# EAGLE board Addon-LAN-WLAN-without-MAPLE_or-OneWire_or_RS485-V01-012 (EAGLE 9.3.0)
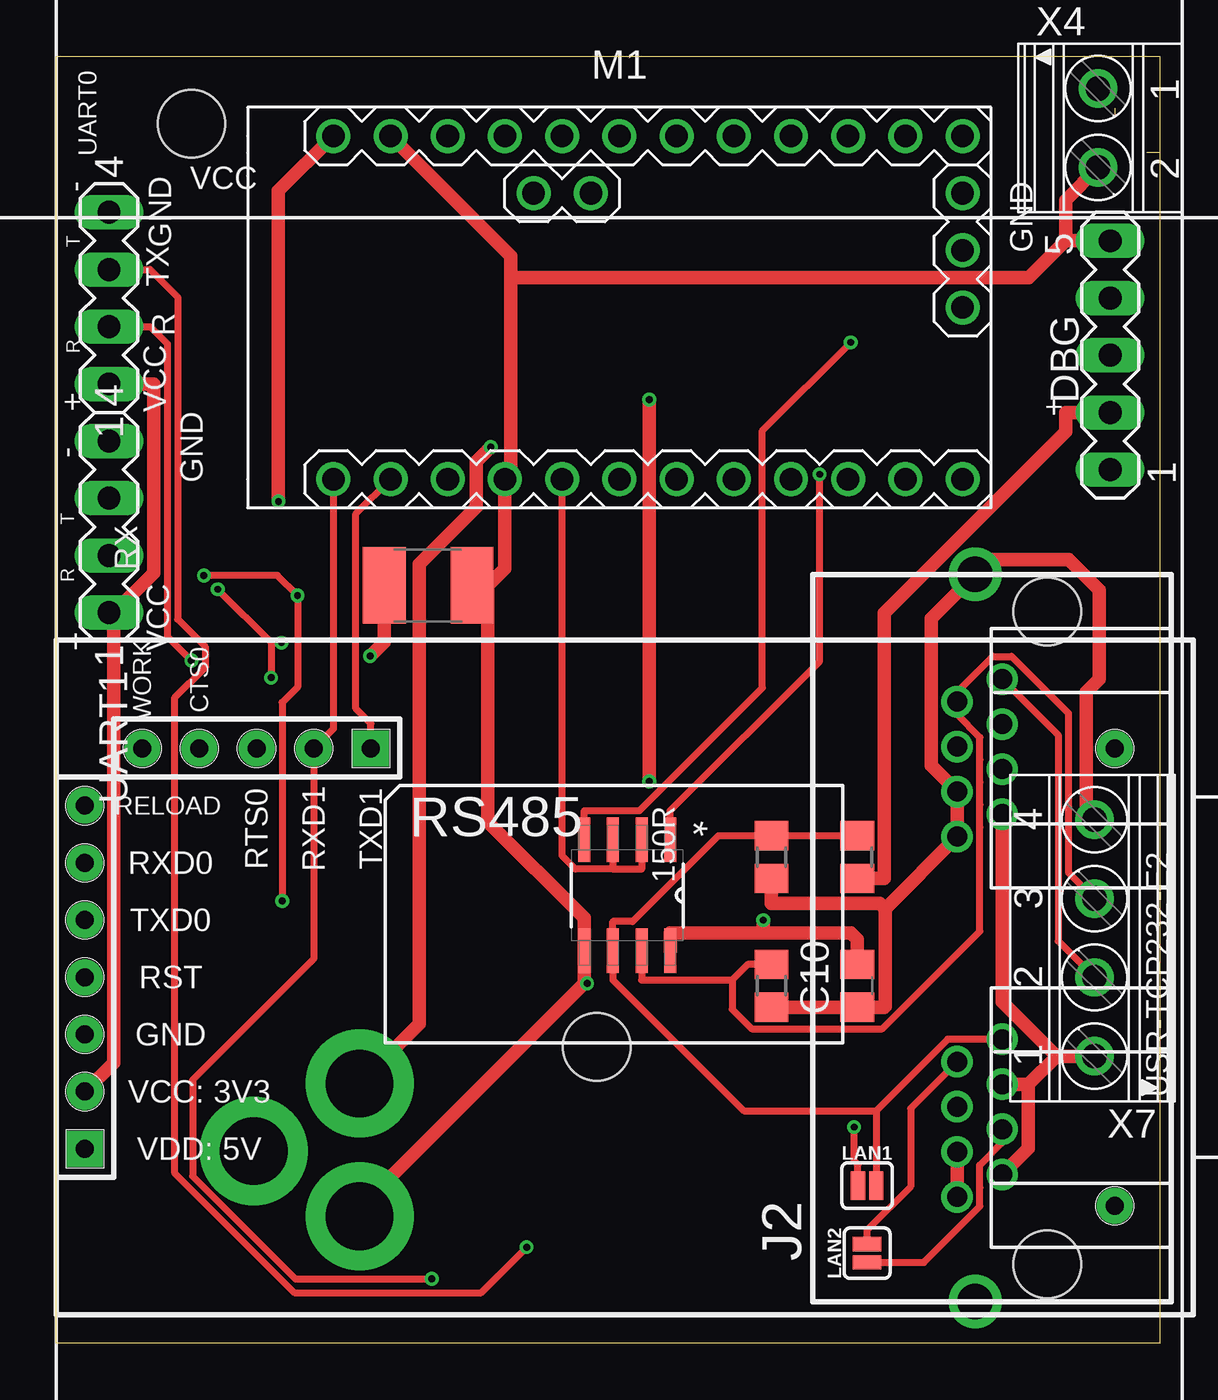
[diagram p0: board, top side]
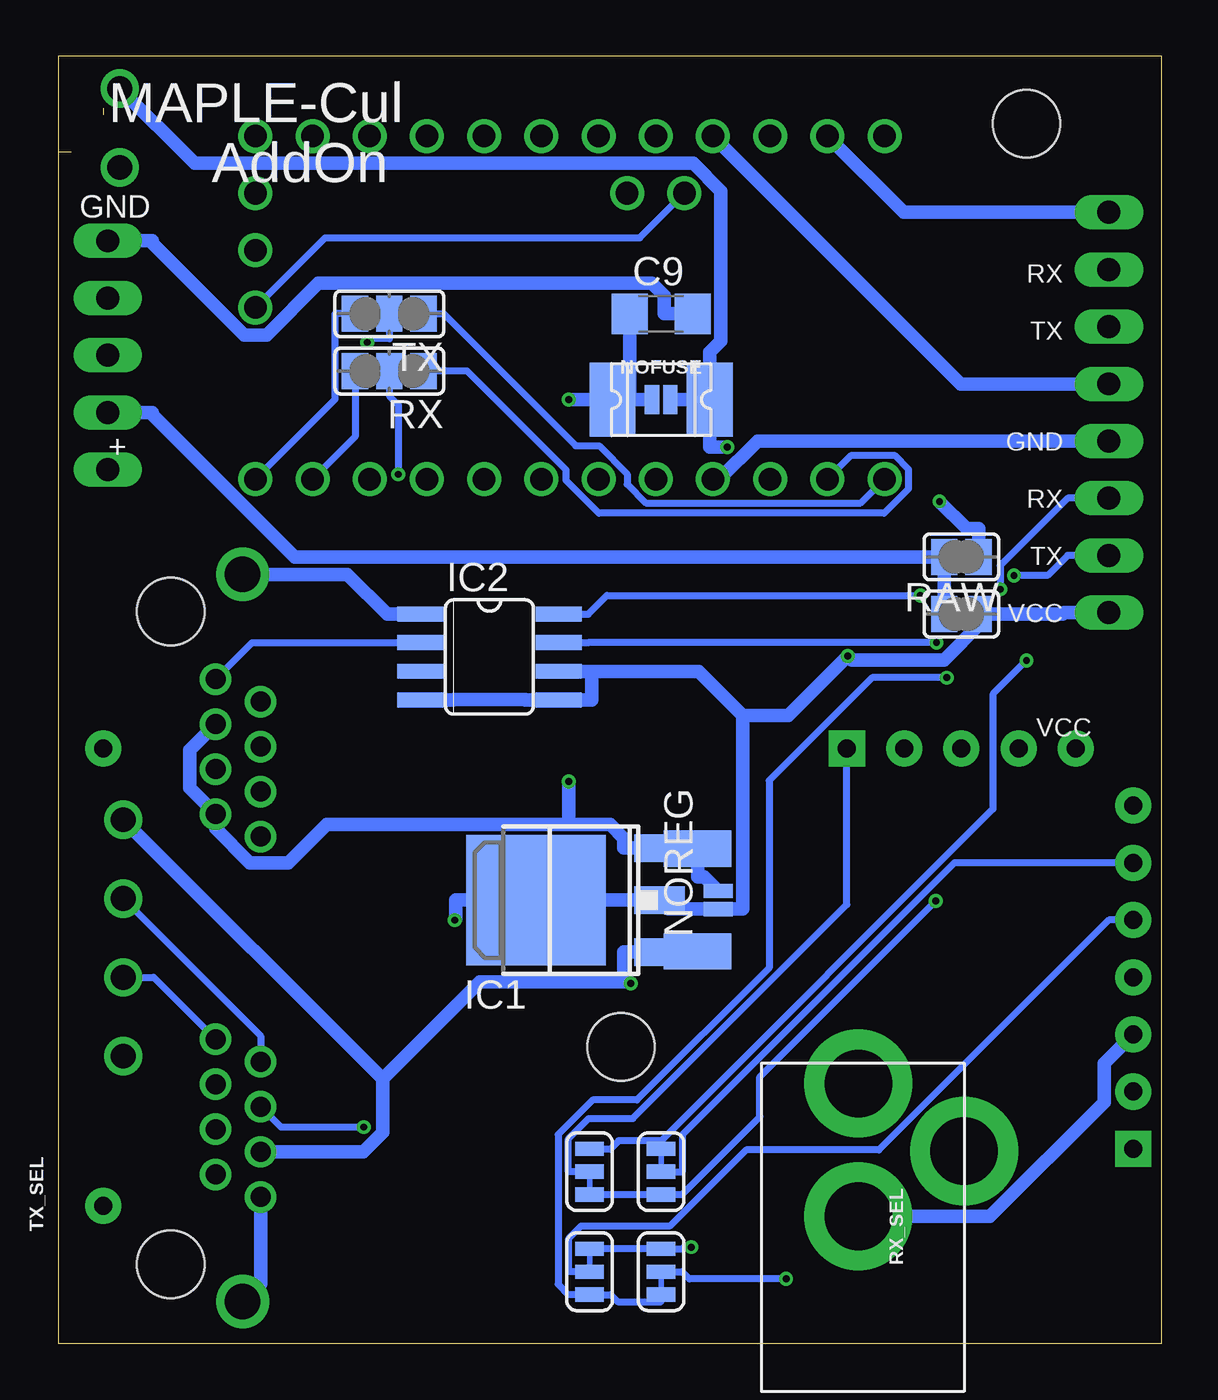
[diagram p1: board, bottom side, seen from below]

Size 49 x 57.16 mm. Coordinates in mm from the lower left corner, seen from the top.
Outline: 49,57.16 49,56.4
Outline: 47,54.86 47,54.57
Outline: 48.41,52.91 49,52.91
Outline: 49,57.16 0,57.16 0,0 49,0 49,52.91
Outline: 49,57.16 49,52.91
Copper layers (1*16): Top 0.035mm / dielectric 1.5mm / Bottom 0.035mm
Design rules "SeeedStudio_2layer_DRU_no_angle_20140221": minimum track width 6mil, minimum drill 12mil, track to track 6mil, track to pad 6mil, pad to pad 6mil, via to via 6mil, smd to smd 0mil, copper to edge 10mil, drill to drill 10mil, minimum pad ring 10mil, minimum via ring 6mil, stop-mask expansion 2mil, vias tented up to drill 100mil, thermal gap 10mil
Net classes: 0 default: width 0.305 mm; 1 PWR: width 0.61 mm
Holes 3 mm at 6,54.16 24,13.16
tRestrict: area 0.4,25.5 to 1.1,57.2
bRestrict: area 0.4,25.5 to 1.1,56.6

## Footprints (pad centres in the part's own frame; a part is rotated, then mirrored left to right if it is on the bottom)
C1812 = smd 1.9 x 3.4: 1 -1.95,0; 2 1.95,0
C1206 = smd 1.6 x 1.8: 1 -1.4,0; 2 1.4,0
C0805 = smd 1.3 x 1.5: 1 -0.95,0; 2 0.95,0
MA05-1 = drill 1.016 long: 1 -5.08,0; 2 -2.54,0; 3 0,0; 4 2.54,0; 5 5.08,0
1812L = smd 2.03 x 3.3: P$1 -2.16,0; P$2 2.16,0
DPACK = smd 1.6 x 3: 1 -2.28,-4.8; 3 2.28,-4.8 | smd 5.8 x 6.2: 4 0,2.38
SO08 = smd 0.66 x 2.032: 1 -1.905,-3.073; 2 -0.635,-3.073; 3 0.635,-3.073; 4 1.905,-3.073; 5 1.905,3.073; 6 0.635,3.073; 7 -0.635,3.073; 8 -1.905,3.073
SOT223 = smd 1.219 x 2.235: 1 -2.311,-3.099; 2 0,-3.099; 3 2.311,-3.099 | smd 3.6 x 2.2: TAB 0,3.099
RJ45_2X_S = drill 0.889: 1-1 -4.5,2; 1-2 -5.5,4; 1-3 -6.5,2; 1-4 -7.5,4; 1-5 -8.5,2; 1-6 -9.5,4; 1-7 -10.5,2; 1-8 -11.5,4; 2-1 11.5,2; 2-2 10.5,4; 2-3 9.5,2; 2-4 8.5,4; 2-5 7.5,2; 2-6 6.5,4; 2-7 5.5,2; 2-8 4.5,4 | drill 1.575 pad 2.184: G1 -16.15,3.2; G3 16.15,3.2 | hole 3: -14.5,0; 14.5,0
SMT-JUMPER_2_NC_PASTE_SILK = smd 0.635 x 1.27: 1 -0.406,0; 2 0.406,0
ARDUINO-PRO-MINI#NP = drill 1: J2.1 -1.27,5.08; J2.2 -3.81,5.08; J3.1 15.24,0; J3.2 15.24,2.54; J3.3 15.24,5.08; J6.1 -12.7,7.62; J6.2 -10.16,7.62; J6.3 -7.62,7.62; J6.4 -5.08,7.62; J6.5 -2.54,7.62; J6.6 0,7.62; J6.7 2.54,7.62; J6.8 5.08,7.62; J6.9 7.62,7.62; J6.10 10.16,7.62; J6.11 12.7,7.62; J6.12 15.24,7.62; J7.1 15.24,-7.62; J7.2 12.7,-7.62; J7.3 10.16,-7.62; J7.4 7.62,-7.62; J7.5 5.08,-7.62; J7.6 2.54,-7.62; J7.7 0,-7.62; J7.8 -2.54,-7.62; J7.9 -5.08,-7.62; J7.10 -7.62,-7.62; J7.11 -10.16,-7.62; J7.12 -12.7,-7.62
SMT-JUMPER_2_NC_PASTE_NO-SILK = smd 0.635 x 1.27: 1 -0.406,0; 2 0.406,0
R0805 = smd 1.3 x 1.5: 1 -0.95,0; 2 0.95,0
SJ = smd 1.168 x 1.6: 1 -0.762,0; 2 0.762,0
SOIC127P600X175-8N = smd 1.981 x 0.533: 1 -2.464,1.905; 2 -2.464,0.635; 3 -2.464,-0.635; 4 -2.464,-1.905; 5 2.464,-1.905; 6 2.464,-0.635; 7 2.464,0.635; 8 2.464,1.905
SJ_2 = smd 1.168 x 1.6: 1 -1.524,0; 2 0,0; 3 1.524,0
SMT-JUMPER_3_1-NC_TRACE_SILK = smd 0.635 x 1.27: 1 -1.016,0; 2 0,0; 3 1.016,0
PJ-102A = drill 3 pad 4.8: RING 0.1,-3.39; RING_SW -4.6,-6.29; TIP 0.1,-9.29
USR-TCP232-E2 = drill 0.8 pad 1.6: 3.3V 1.27,9.906; CTS0 6.35,25.146; GND 1.27,12.446; P$13 46.99,25.146; P$14 46.99,4.826; RELOAD 1.27,22.606; RST 1.27,14.986; RTS0 8.89,25.146; RXD0 1.27,20.066; RXD1 11.43,25.146; TXD0 1.27,17.526; WORK 3.81,25.146 | drill 0.8 pad 1.6 square: 5V 1.27,7.366; TXD1 13.97,25.146
MA04-1 = drill 1.016 long: 1 -3.81,0; 2 -1.27,0; 3 1.27,0; 4 3.81,0
1751248 = drill 1.1 pad 1.7: 1 -1.75,-0.1; 2 1.75,-0.1
1751264 = drill 1.1 pad 1.7: 1 -5.25,-0.1; 2 -1.75,-0.1; 3 1.75,-0.1; 4 5.25,-0.1

## Placement (x,y rotation side)
C7  [C1812]  16.51,33.66 180 top
C9  0.1uF  [C1206]  22.23,45.72 0 bottom
C10  22p  [C0805]  35.56,15.88 90 top
DBG  [MA05-1]  46.79,43.88 90 top
F1  1812L  [1812L]  22.23,41.91 0 bottom
IC1  LD117ADT50TR  [DPACK]  25.4,19.68 90 bottom
IC2  DS2480B  [SO08]  29.84,30.48 270 bottom
IC6  LM1117MPX-ADJ  [SOT223]  25.4,19.68 90 bottom
J2  [RJ45_2X_S]  44,18 90 top
LAN1  JUMPER-SMT_2_NC_PASTE_SILK  [SMT-JUMPER_2_NC_PASTE_SILK]  36,7 0 top
LAN2  JUMPER-SMT_2_NC_PASTE_SILK  [SMT-JUMPER_2_NC_PASTE_SILK]  36,4 90 top
M1  ARDUINO-PRO-MINI-3.3V#NP  [ARDUINO-PRO-MINI#NP]  25,46 0 top
NOFUSE  JUMPER-SMT_2_NC_PASTE_NO-SILK  [SMT-JUMPER_2_NC_PASTE_NO-SILK]  22.23,41.91 0 bottom
NOREG  JUMPER-SMT_2_NC_PASTE_NO-SILK  [SMT-JUMPER_2_NC_PASTE_NO-SILK]  19.68,19.68 90 bottom
R4  5K6  [R0805]  31.75,21.59 90 top
R5  22K  [R0805]  35.56,21.59 90 top
R6  4K7  [R0805]  31.75,15.88 270 top
RAW  [SJ]  8.89,34.92 180 bottom
REG1  [SJ]  8.89,32.38 0 bottom
RS485  MAX487ECSA+  [SOIC127P600X175-8N]  25.35,19.89 270 top
RX  [SJ_2]  34.29,43.18 180 bottom
RX_1  JUMPER-SMT_3_1-NC_TRACE_SILK  [SMT-JUMPER_3_1-NC_TRACE_SILK]  25.4,3.17 90 bottom
RX_SEL  JUMPER-SMT_3_1-NC_TRACE_SILK  [SMT-JUMPER_3_1-NC_TRACE_SILK]  22.23,3.17 270 bottom
TX  [SJ_2]  34.29,45.72 180 bottom
TX_1  JUMPER-SMT_3_1-NC_TRACE_SILK  [SMT-JUMPER_3_1-NC_TRACE_SILK]  22.23,7.62 90 bottom
TX_SEL  JUMPER-SMT_3_1-NC_TRACE_SILK  [SMT-JUMPER_3_1-NC_TRACE_SILK]  25.4,7.62 270 bottom
U$2  2.1MMJACKTHM  [PJ-102A]  13.37,2.25 180 bottom
U$5  USR-TCP232-E2  [USR-TCP232-E2]  0,1.27 0 top
UART0  [MA04-1]  2.34,46.42 90 top
UART1  [MA04-1]  2.34,36.26 90 top
X4  1751248  [1751248]  46.35,53.98 270 top
X7  1751264  [1751264]  46,18 90 top

## Library data of the parts
C7 C9 = rcl; SPICEPREFIX: C
C10 R4-R6 = rcl
DBG UART0 UART1 = con-lstb; OC_FARNELL: unknown; OC_NEWARK: unknown
F1 = ptc-littlefuse
IC1 = v-reg
IC2 = 1wire
IC6 = lm1117
J2 = RJ45
LAN1 LAN2 NOFUSE NOREG RX_1 RX_SEL TX_1 TX_SEL = SparkFun-Jumpers
M1 = diy-modules
RAW REG1 RX TX = jumper
RS485 = Maxim_By_element14_Batch_1; MPN: MAX487ECSA+; OC_FARNELL: 9724532; OC_NEWARK: 68K4803; PACKAGE: SOIC-8; SUPPLIER: Maxim
U$2 = adafruit
U$5 = #Usr-tcp232
X4 = con-phoenix-350; OC_FARNELL: unknown; OC_NEWARK: unknown
X7 = con-phoenix-350; MPN: 1751264; OC_FARNELL: unknown; OC_NEWARK: 10R0934

## Nets
4: J2.1-4 LAN1.1
5: J2.1-5 LAN2.1
5V [PWR]: DBG.1
5V.: U$5.5V
A: IC2.2 J2.1-1 J2.2-1 LAN1.2 R4.2 R5.2 RS485.6 X7.2
A0: M1.J6.8
A1: M1.J6.7
A2: M1.J6.6
A3: M1.J6.5
A4: M1.J2.1
A5: M1.J2.2 M1.J3.1
A6: M1.J3.2
A7: M1.J3.3
ATSHA_D7: M1.J7.3
B: J2.1-2 J2.2-2 LAN2.2 R6.1 RS485.7 X7.3
CSN: M1.J6.12
D3: M1.J7.7
D4: M1.J7.6
D5: M1.J7.5
D6: M1.J7.4
D8: M1.J7.2 RX.3
D9: M1.J7.1 TX.3
DI1: RS485.4 TX.2
GND [PWR]: C7.1 C9.2 C10.1 DBG.5 IC1.1 IC2.1 IC6.1 J2.1-6 J2.1-8 J2.2-6 J2.2-8 J2.G1 J2.G3 M1.J6.2 M1.J7.9 R4.1 R6.2 RS485.5 U$2.RING U$5.GND UART0.4 UART1.4 X4.2 X7.4
IN [PWR]: DBG.2 R5.1 RAW.2 REG1.1
IRQ: M1.J7.8 RS485.2 RS485.3
MISO: M1.J6.10
MOSI: M1.J6.11
RAW1 [PWR]: M1.J6.1 RAW.1
RESET: M1.J7.10
RO: RS485.1 RX.2
RX: M1.J7.11 RX.1 TX_SEL.2 U$5.TXD1
RX0: RX_1.3 RX_SEL.1 UART0.3
RX1: IC2.7 RX_1.1 RX_SEL.3 UART1.3
RX_DBG: DBG.4
SCK: M1.J6.9
TX: M1.J7.12 RX_SEL.2 TX.1 U$5.RXD1
TX0: TX_1.3 TX_SEL.1 UART0.2
TX1: IC2.8 TX_1.1 TX_SEL.3 UART1.2
TX_DBG: DBG.3
USRRX0: TX_1.2 U$5.RXD0
USRTX0: RX_1.2 U$5.TXD0
VCC [PWR]: C7.2 C10.2 IC1.4 IC2.4 IC2.5 IC2.6 IC6.2 IC6.TAB M1.J6.4 NOREG.1 REG1.2 RS485.8 U$5.3.3V UART0.1 UART1.1
VIN [PWR]: C9.1 F1.P$1 IC1.3 IC6.3 J2.1-3 J2.1-7 J2.2-3 J2.2-7 NOFUSE.1 NOREG.2 X7.1
VINPUT [PWR]: F1.P$2 NOFUSE.2 U$2.TIP X4.1

## Tracks (layer width: path | path; a pad name or v marks a point on that pad's centre or on a via)
4  (via drill 0.3 pad 0.61)
  Top 0.305: LAN1.1 35.59,7.94 35.42,8.11 v35.42,9.6
  Bottom 0.305: v35.42,9.6 39.1,9.6 J2.1-4
5
  Top 0.305: LAN2.1 38.52,3.59 41.01,6.08 41.01,6.91 40.99,6.93 40.99,7.91 42,8.92 J2.1-5
A
  Top 0.305: R5.2 R4.2 29.4,22.54 25.58,18.73 24.71,18.73 RS485.6 24.71,16.14 30.52,10.33 36.41,10.33 | J2.2-1 44.48,27.02 44.48,17.87 X7.2 | 36.41,10.33 LAN1.2 | J2.1-1 39.58,13.5 36.41,10.33
  Bottom 0.305: X7.2 44.75,16.25 J2.1-1 | J2.2-1 40.38,31.11 IC2.2
A5
  Bottom 0.305: M1.J3.1 37.14,49.1 23.17,49.1 M1.J2.2
B
  Top 0.305: 30.01,16.14 30.7,16.82 R6.1 | 30.01,16.14 25.98,16.14 RS485.7 | 30.01,16.14 30.01,14.84 30.87,13.97 36.68,13.97 41.01,18.3 41.01,22.91 40.99,22.93 40.99,23.91 41.01,23.93 41.01,24.91 40.99,24.93 40.99,25.91 41.01,25.93 41.01,26.91 40,27.92 J2.2-2 40,28.92 41.58,30.5 42.42,30.5 44.94,27.98 44.94,20.91 X7.3 | LAN2.2 36,5.03 37.93,6.96 37.93,10.43 J2.1-2
  Bottom 0.305: X7.3 40,13.65 J2.1-2
D8
  Bottom 0.305: RX.3 35.81,40.27 M1.J7.2
D9
  Bottom 0.305: TX.3 36.7,45.72 36.7,41.92 M1.J7.1
DI1  (via drill 0.3 pad 0.61)
  Top 0.305: v35.27,44.45 31.35,40.53 31.35,29.11 25.9,23.65 23.45,23.65 RS485.4
  Bottom 0.305: TX.2 34.29,44.62 35.1,44.62 v35.27,44.45
GND  (via drill 0.3 pad 0.61)
  Top 0.61: 36.8,19.3 36.56,19.53 31.75,19.53 R4.1 | 36.8,19.3 36.8,14.96 36.77,14.93 C10.1 R6.2 | 36.8,19.3 | 36.8,19.3 J2.2-8 J2.2-6 38.84,25.66 38.84,32.19 J2.G3 41.46,34.81 44.96,34.81 46.31,33.46 46.31,29.5 45.73,28.92 45.73,23.62 X7.4 | 23.45,15.98 v23.57,15.98 | 23.45,15.98 13.46,6 U$2.RING | 23.45,15.98 23.45,16.17 RS485.5 23.45,18.88 19.16,23.16 19.16,33.66 | 20.17,47.33 20.17,48.29 M1.J6.2 | 20.17,47.33 20.17,38.63 M1.J7.9 19.92,34.41 19.16,33.66 | 44.81,48.96 43.17,47.33 20.17,47.33 | X4.2 44.81,50.78 44.81,48.96 | J2.1-8 J2.1-6 | C7.1 19.16,33.66 | DBG.5 44.81,48.96
  Bottom 0.61: U$2.RING 7.62,5.63 2.55,10.71 2.55,12.43 U$5.GND | 34.59,11.74 34.59,9.36 35.44,8.5 J2.1-6 | X7.4 34.59,11.74 | 34.59,11.74 30.27,16.06 23.88,16.06 | 23.88,16.06 23.64,16.06 v23.57,15.98 | 23.88,16.06 23.88,17.37 IC6.1 20.73,17.37 20.7,17.41 IC1.1 | IC2.1 34.39,32.38 36.16,34.15 J2.G3 | J2.G1 40,2.65 J2.1-8 | UART1.4 4.32,40.07 17.94,40.07 19.63,38.38 M1.J7.9 | M1.J6.2 11.45,50.23 UART0.4 | C9.2 20.99,45.72 22.08,45.72 22.08,46.52 22.64,47.08 37.45,47.08 39.74,44.78 40.74,44.78 44.81,48.85 44.81,48.96 DBG.5
IN
  Top 0.61: R5.1 36.77,20.64 36.77,32.44 44.81,40.48 44.81,41.34 DBG.2
  Bottom 0.61: REG1.1 9.65,33.64 RAW.2 10.69,34.92 38.5,34.92 44.81,41.23 44.81,41.34 DBG.2
IRQ
  Top 0.305: 24.71,21.06 23.04,21.06 22.46,21.65 M1.J7.8 | 24.71,21.06 24.71,21.18 RS485.3 | RS485.2 25.98,21.06 24.71,21.06
RAW1  (via drill 0.3 pad 0.61)
  Top 0.61: v9.86,37.39 9.86,51.18 M1.J6.1
  Bottom 0.61: RAW.1 8.13,36.18 8.66,36.18 v9.86,37.39
RO  (via drill 0.3 pad 0.61)
  Top 0.305: v33.89,38.59 33.89,30.29 27.25,23.65 RS485.1
  Bottom 0.305: RX.2 34.29,42.08 33.89,41.67 v33.89,38.59
RX
  Top 0.305: M1.J7.11 13.3,36.84 13.3,28.19 13.97,27.52 U$5.TXD1
  Bottom 0.305: M1.J7.11 13.78,39.44 11.86,39.44 11.24,38.82 11.24,37.94 12.32,36.86 24.98,36.86 26.44,38.32 26.44,38.78 30.84,43.18 RX.1 | U$5.TXD1 13.97,19.48 23.48,9.98 25.45,9.98 26.34,9.08 26.34,7.62 TX_SEL.2
RX0  (via drill 0.3 pad 0.61)
  Top 0.305: UART0.3 4.17,47.69 5.39,46.47 5.39,32.16 6.61,30.94 6.61,30.02 5.24,28.65 5.24,7.58 10.57,2.25 18.87,2.25 v20.88,4.27
  Bottom 0.305: v20.88,4.27 21.21,4.27 21.29,4.19 RX_SEL.1 RX_1.3
RX1  (via drill 0.3 pad 0.61)
  Top 0.305: 9.54,31.11 v10,31.11 | v7.17,33.48 9.54,31.11 | 9.54,31.11 v9.54,29.56
  Bottom 0.305: v9.54,29.56 12.86,29.56 17.43,24.99 17.43,16.67 23.29,10.81 25.26,10.81 26.8,9.27 26.8,2.62 26.34,2.16 RX_1.1 24.46,2.16 24.15,1.85 22.23,1.85 RX_SEL.3 | UART1.3 4.17,37.53 7.17,34.53 v7.17,33.48 | v10,31.11 10.01,31.13 25.43,31.13 25.45,31.11 IC2.7
TX  (via drill 0.3 pad 0.61)
  Top 0.305: v16.67,2.86 10.61,2.86 6.06,7.42 6.06,11.69 11.43,17.06 U$5.RXD1 12.3,27.29 M1.J7.12
  Bottom 0.305: M1.J7.12 13.36,37.32 22.9,37.32 23.73,38.15 23.73,38.61 24.98,39.86 26.02,39.86 31.88,45.72 TX.1 | RX_SEL.2 21.29,3.17 20.97,2.86 v16.67,2.86
TX0  (via drill 0.3 pad 0.61)
  Top 0.305: v6,30.33 4.93,31.4 4.93,44.39 4.17,45.15 UART0.2
  Bottom 0.305: v6,30.33 7.5,28.83 7.5,23.72 22.23,8.99 | TX_SEL.1 24.46,8.64 24.11,8.99 22.23,8.99 | TX_1.3 22.23,8.99
TX1  (via drill 0.3 pad 0.61)
  Top 0.305: v6.55,34.1 9.82,34.1 v10.71,33.21 10.71,29.14 10.03,28.46 v10.03,19.64
  Bottom 0.305: v6.55,34.1 5.06,34.1 4.17,34.99 UART1.2 | v10.03,19.64 17.83,11.84 17.83,10.06 21.29,6.6 TX_1.1 TX_SEL.3 | IC2.8 25.45,32.38 24.63,33.21 v10.71,33.21
USRRX0
  Bottom 0.305: TX_1.2 21.29,7.62 21.29,9.25 9.2,21.34 U$5.RXD0
USRTX0
  Bottom 0.305: RX_1.2 26.34,3.17 26.34,4.64 25.78,5.19 21.84,5.19 18.45,8.59 12.55,8.59 2.34,18.8 U$5.TXD0
VCC  (via drill 0.3 pad 0.61)
  Top 0.61: 31.39,18.21 35.28,18.21 35.56,17.93 C10.2 | 31.39,18.21 27.25,18.21 RS485.8 | 31.39,18.21 v31.39,18.79 | v13.93,30.52 14.56,31.15 C7.2 | 2.55,32.45 4.32,34.22 4.32,42.61 UART0.1 | 2.55,32.45 2.55,12.46 U$5.3.3V | UART1.1 2.55,32.45
  Bottom 0.61: v31.39,18.79 31.34,18.84 31.34,19.68 IC6.TAB IC1.4 24.22,19.68 IC6.2 21.89,19.28 NOREG.1 18.59,19.28 18.59,27.88 | IC2.4 31.45,28.57 31.43,28.59 28.26,28.59 28.25,28.57 IC2.5 25.3,28.57 25.3,29.84 | UART0.1 4.32,42.61 8.91,42.61 M1.J6.4 | 18.59,27.88 16.58,27.88 v13.93,30.52 13.76,30.35 9.66,30.35 8,32.01 8,32.38 | 25.3,29.84 20.56,29.84 18.59,27.88 | 8,32.38 7.61,32.38 4.39,32.38 4.32,32.45 UART1.1 | REG1.2 8,32.38 | IC2.6 25.3,29.84
VIN  (via drill 0.3 pad 0.61)
  Top 0.61: 44.41,12.75 43.16,11.5 | X7.1 44.41,12.75 | J2.2-7 42,15.16 44.41,12.75 | 43.16,11.5 J2.1-3 | J2.1-7 43.16,8.66 43.16,11.5 | v26.32,41.91 v26.32,24.95
  Bottom 0.61: 26.32,23.05 v26.32,24.95 | 26.32,23.05 24.49,23.05 23.88,22.43 23.88,22 IC6.3 20.73,22 20.73,21.46 20.6,21.34 | 26.32,23.05 37.08,23.05 38.78,21.34 40.48,21.34 42,22.86 J2.2-7 43.16,24.66 43.16,26.34 J2.2-3 | v26.32,41.91 25.86,41.91 F1.P$1 23.65,41.91 23.64,41.92 23.62,41.92 | 23.62,41.92 23.42,41.92 23.41,41.91 NOFUSE.1 | 23.62,41.92 C9.1 | 20.6,21.34 20.6,20.71 20.3,20.71 NOREG.2 | IC1.3 20.6,21.34
VINPUT  (via drill 0.3 pad 0.61)
  Top 0.61: U$2.TIP 16.12,14.19 16.12,34.62 18.65,37.15 18.65,39.16 v19.29,39.8
  Bottom 0.61: F1.P$2 20.07,44.02 19.57,44.51 19.57,51.17 20.8,52.4 42.93,52.4 X4.1 | v19.29,39.8 20.07,39.8 F1.P$2 | NOFUSE.2 F1.P$2

## Text on the board
tNames: GND | GND | VCC | - | T | GND | TX | R | R | + | VCC | + | - | GND | T | R | RX | VCC | VCC | + | RS485 | 150R | GND | GND | PWR-IN
bNames: GND | for 3V3 Serial Raspi AddOns / and CC2530 V0.3 | MAPLE-Cul / AddOn | GND | RX | TX | GND | + | RX | VCC | TX | VCC | VCC | older Board dont have 5 Pins => | GND | GND | GND | VCC | VIN | GND | + | VCC | GND